# Altium PCB mchf_pro_ui.PcbDoc (part 2 of 6)
Units mm, origin at the board's own origin, x right, y up, seen from the top; angles counter-clockwise.
Board outline 200.09 x 143.79 mm, 2 copper layers (Top Layer, Bottom Layer); 329 components, 335 nets, 1276 pads, 515 vias.
Unrouted connection lines stored in the file: 91.
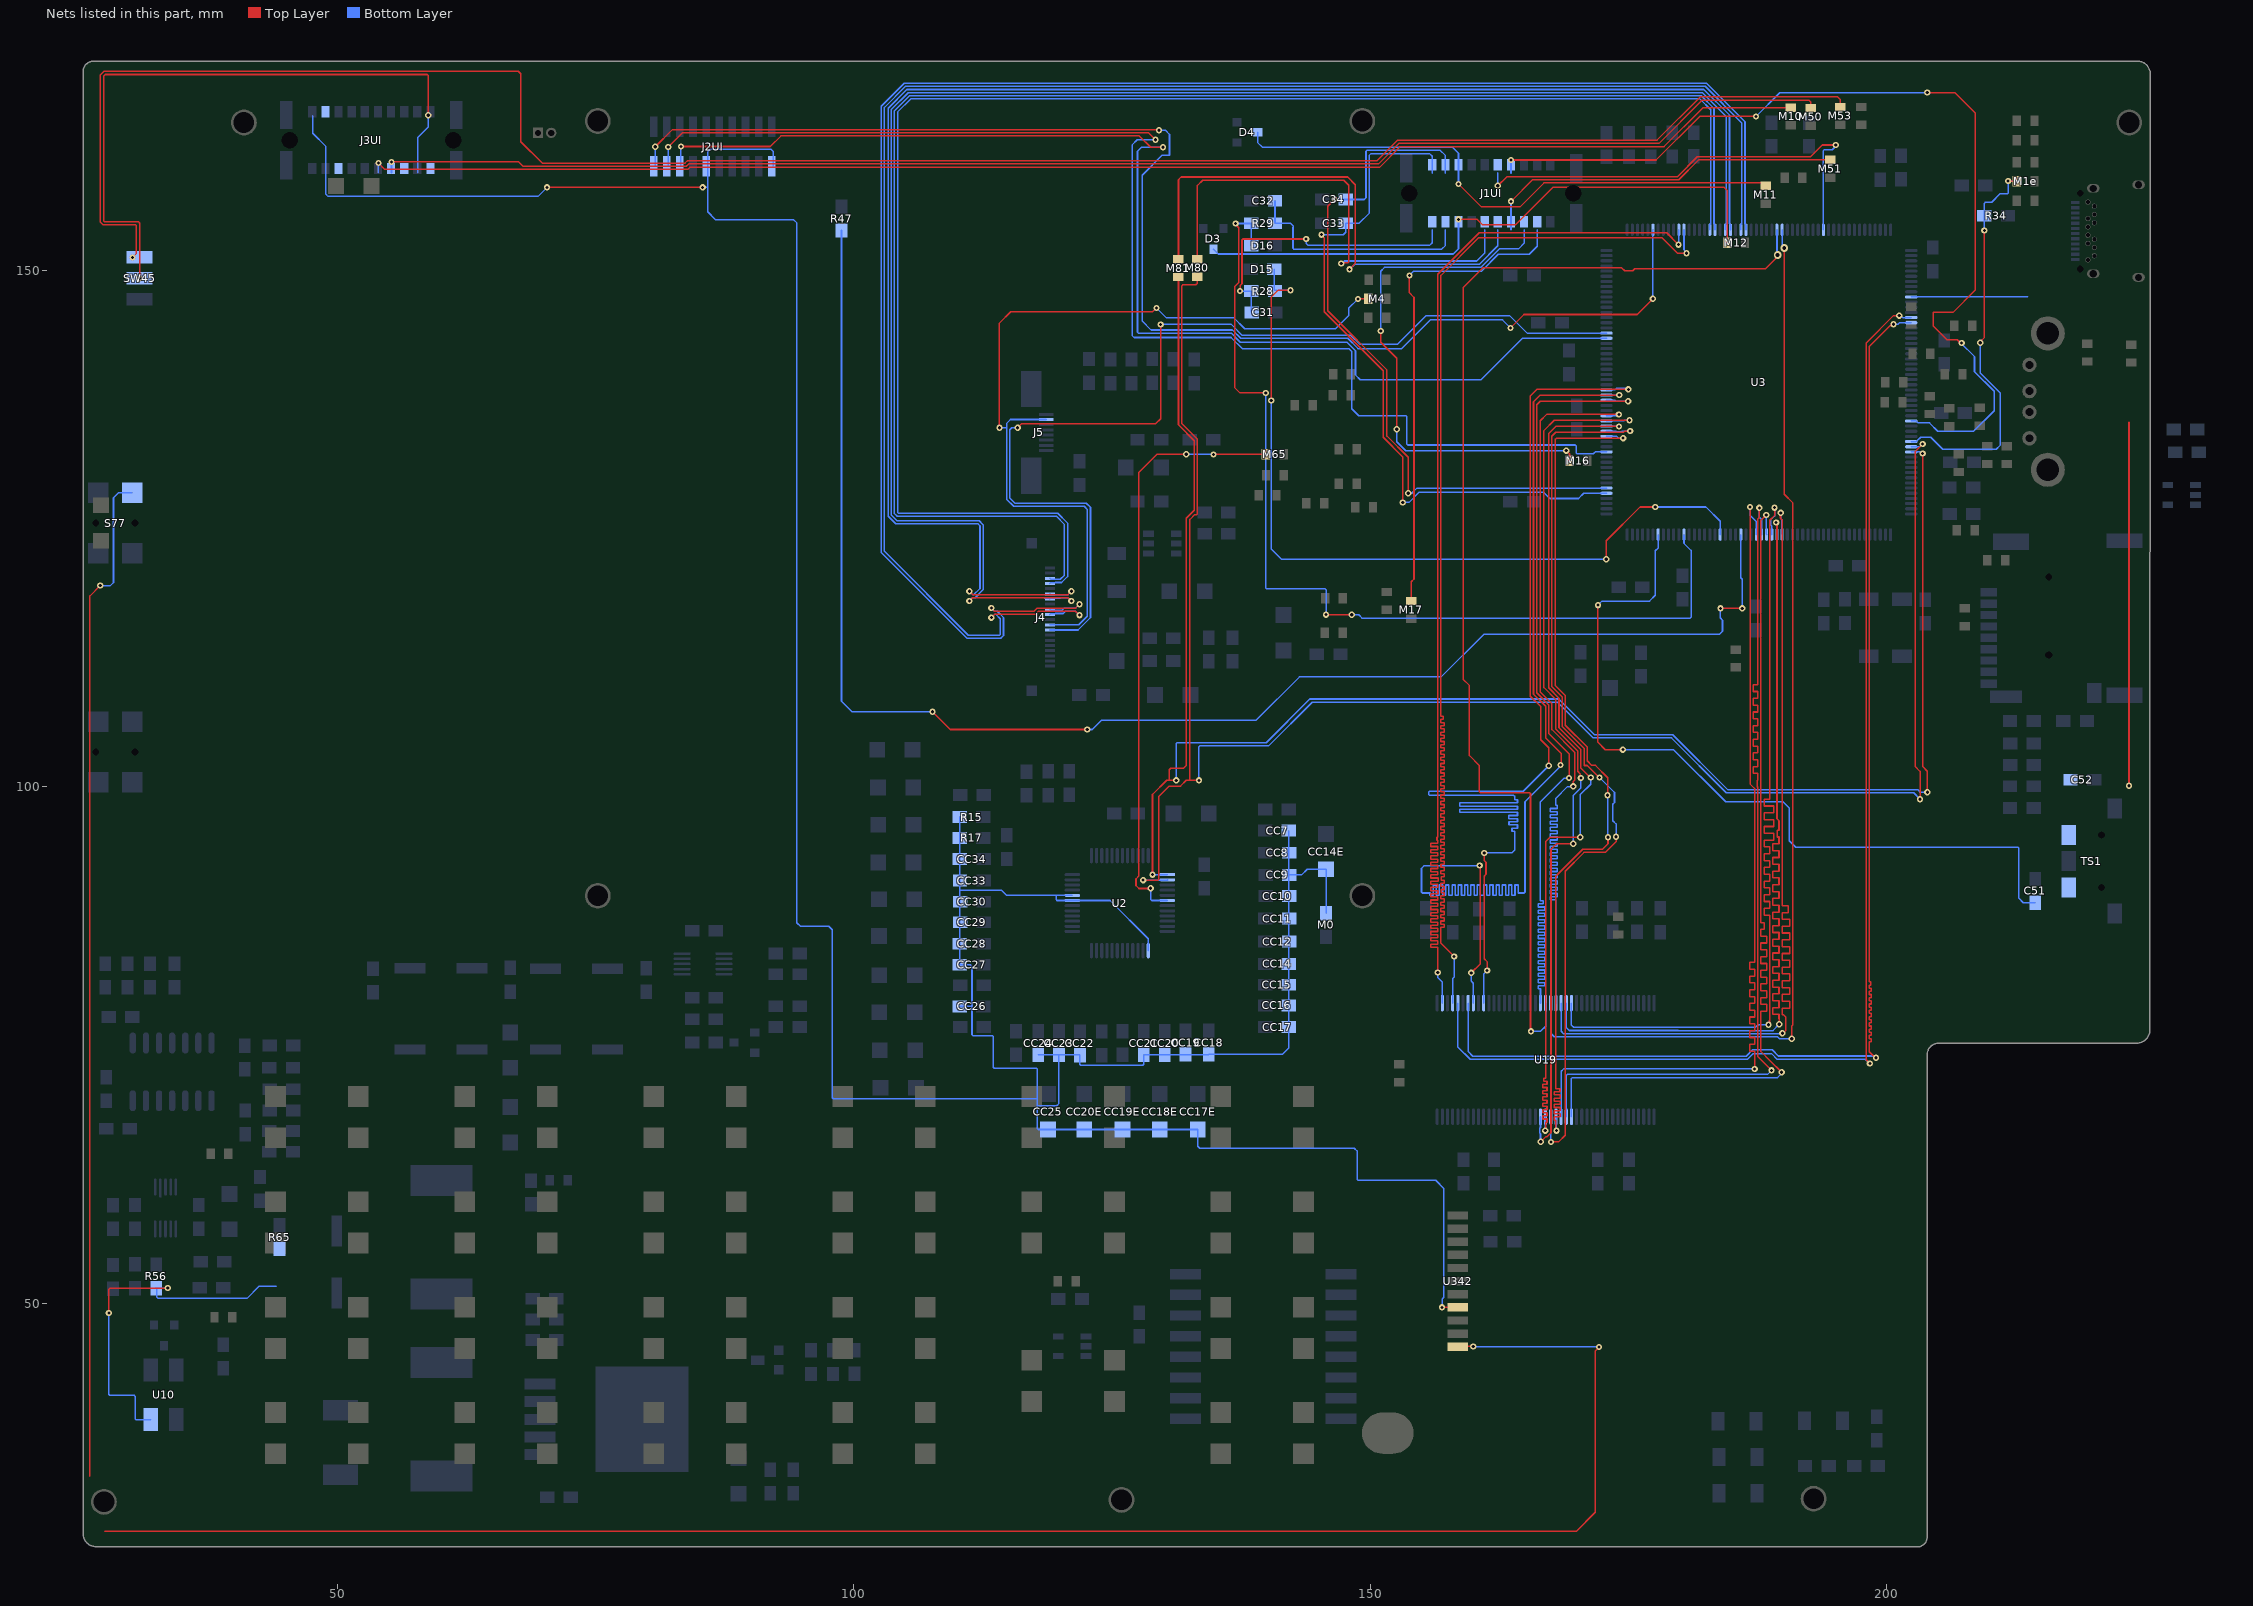
[diagram p2: the nets of this part, all layers, seen from the top]

## Part data
C1 C2 C5 C6 C7 C8 C9 C10 C11 C12 C13 C14 C15 C16 C17 C55 C66 CC14E CC17E CC18E CC19E CC20E CC25 CP44E: library part CAP-POL, "Electrolitic capacitor"
  C1: Notes="Aluminium capacitor", Order="FN 225-4321", Price=0.34, QT Order=QCC-00320
  C2 C6: Order="FN 225-4321", Price=0.34, QT Order=QCC-00320
  C5: Notes="Aluminium capacitor", Price=0.34
  C7 C66 CC17E CC18E: Order="FN 233-3009", Price=0.204, QT Order=QCC-00166
  C8: Notes="Tantalum capacitor", Order="FN 145-7406", Price=0.235, QT Order=QCC-00165
  C9 C10 C11 C12 C13 C14 C15 C16 C17: Order="FN 145-7406", Price=0.235, QT Order=QCC-00165
  C55: Order="FN 145-7414", Price=0.30, QT Order=QCC-00166
  CC14E: Notes="Tantalum capacitor", Order="FN 233-3009", Price=0.204, QT Order=QCC-00166
  CC19E CC25: Notes="Tantalum Capacitor", Price=0.204
  CC20E: Price=0.204
  CP44E: Order="FN 145-7406", Price=0.235, QT Order=QCC-00172
C3 C4 C18 C19 C31 C32 C32a C33 C34 C34d C39 C40 C43 C48 C51 C52 C53 C58 C59 C64 C65 C67 C68 C69 C70 C71 C72 C73 C751 CC5 CC7 CC8 CC9 CC10 CC11 CC12 CC14 CC15 CC16 CC17 CC18 CC19 CC20 CC21 CC22 CC23 CC24 CC26 CC26a CC27 CC27a CC28 CC29 CC30 CC33 CC34 CC36 CC46 Cp7 Cp17 Cp29 Cp44 Cp49 Cp56 Cp74 Cp80 Cp100 Cp108 Cp114 Cp117 CP119 CP119E Cp133 Cp155 Cp161 Cp179 Cp187 Cp208 Cr1 Cr3 Cr9 Cr15 Cr29 Cr35 Cr41 Cr43 Cr49 Cr55 Cr75 Cr81: library part CAP, "Capacitor"
  C3 C4 C31 C32 C33 C34 C34d C65 C67 C73 C751 CC5 CC14 CC17 CC18 CC19 CC20 CC30 CC36 CC46: Order="FN 252-2090", Price=0.068, QT Order=QCC-00154
  C18 C19 C59 C64 CC15 CP119 CP119E: Published=8-Jun-2000, Publisher="Altium Limited", Revision="July-2002: Re-released for DXP Platform."
  C32a: Price=0.068, QT Order=QCC-00154
  C39: Order="FN 756-8401", Price=0.341, QT Order=QCC-00266, QT Price=0.045
  C40: Order="FN 756-8401", Price=0.341, QT Order=QCC-00266
  C43 C48 C53 C58 Cp7 Cp17 Cp29 Cp44 Cp49 Cp56 Cp74 Cp80 Cp100 Cp108 Cp114 Cp117 Cp133 Cp155 Cp161 Cp179 Cp187 Cp208 Cr1 Cr3 Cr9 Cr15 Cr29 Cr35 Cr41 Cr43 Cr49 Cr55 Cr75 Cr81: Order="FN 282-1264", Price=0.089, QT Order=QCC-00157
  C51: Order="FN 190-7054", Price=0.038, QT Order=QCC-00259, QT Price=0.05
  C52: Order="FN 190-7054", Price=0.038, QT Order=QCC-00259
  C69 C70: Order="FN 233-2701", Price=0.078, QT Order=QCC-00125
  C72: Order="FN 174-0673", Price=0.068, QT Order=QCC-00154
  CC16: Notes="Ceramic Capacitor, low ESR", Published=8-Jun-2000, Publisher="Altium Limited", Revision="July-2002: Re-released for DXP Platform."
C42 C74g CP140: library part "CAP SMD 0603  X5R 1礔 25V 10%", "0603  X5R 1礔", Rated voltage=25V, Temperature Max=+125癈, Temperature Min=-55癈, Tolerance=10%, Order code Farnell=1288202RL, Technology=X5R
C56: library part CAP, "Ceramic Capacitor", Order="FN 175-9477", Price=0.114, QT Order=QCC-00447
C57: library part CAP-POL, "Electrolitic capacitor", Voltage=50V, Order="FN 145-7406", Price=0.235, QT Order=QCC-00172
C60 CP43E: library part "Cap Pol1", Published=8-Jun-2000, Publisher="Altium Limited", Revision="July-2002: Re-released for DXP Platform."
C61 C62 C63 C174 C176 C178 C222: library part CAP, "Capacitor", Voltage=100V
  C61 C62 C63: Notes=COG/NPO
  C174 C176 C178 C222: Price=0.068, QT Order=QCC-00154
C175: library part CAP-POL, "Electrolitic capacitor", Voltage=25V, Price=0.235, QT Order=QCC-00202
C177: library part CAP-POL, "Electrolitic capacitor", Voltage=16V, Price=0.235, QT Order=QCC-00202
CP43 CP199: library part Cap, "Capacitor", Published=8-Jun-2000, Publisher="Altium Limited", Revision="July-2002: Re-released for DXP Platform."
CP89 CP152: library part cap, "Capacitor", ECCN_US/EU=NA, Fitted=NO, Notes="Ceramic capacitor, low ESR", Ordered by=Subcon, Published=8-Jun-2000, Publisher="Altium Limited", Revision="July-2002: Re-released for DXP Platform."
D3 D4: "Small Signal Diode, Dual Series", Order="FN 162-1837", Price=0.0618
  D3: QT Order=QCD-00039
D15 D16: library part "D Zener", "Zener Diode", LatestRevisionDate=17-Jul-2002, LatestRevisionNote="Re-released for DXP Platform.", PackageDescription="Diode, Thru-Hole; 2 Leads; 0.7 in Pin Spacing", PackageReference=DIODE-0.7, Published=8-Jun-2000, Publisher="Altium Limited"
D17 D18 D19 D120 D123: "DIODE, SCHOTTKY, 1A, 60V, SOD-123F", QT Order=QCD-00034
  D17 D18 D120 D123: Price=0.085
  D19: Order="FN 151-0694", Price=0.262, QT Price=0.08
D108: library part PMEG6010CEH, "DIODE, SCHOTTKY, 1A, 60V, SOD-123F", Price=0.085, QT Order=QCD-00034
J1UI J3UI: "SMD male connector, nominal current: 2.2 A, Test voltage: 840 VAC, number of positions: 20, pitch: 1.27 mm, color: black, contact surface: Gold, type of contact: Male connector, mounting: SMD soldering", Manufacturer_Name="Phoenix Contact", Mouser Part Number=651-1373866, Datasheet Link=http://www.phoenixcontact.com/gb/produkte/1373866, Geometry.Height=6.75mm, Manufacturer_Part_Number=1373866, Mouser Price/Stock=https://www.mouser.co.uk/ProductDetail/Phoenix-Contact/1373866?qs=2SLPxufLcgAs0enIXKjUUw%3D%3D
J2UI: library part YQ_20p, "SMD male connector, nominal current: 2.2 A, Test voltage: 840 VAC, number of positions: 20, pitch: 1.27 mm, color: black, contact surface: Gold, type of contact: Male connector, mounting: SMD soldering", Manufacturer_Name="Phoenix Contact", Mouser Part Number=651-1373866, Datasheet Link=http://www.phoenixcontact.com/gb/produkte/1373866, Geometry.Height=6.75mm, Manufacturer_Part_Number=1373866, Mouser Price/Stock=https://www.mouser.co.uk/ProductDetail/Phoenix-Contact/1373866?qs=2SLPxufLcgAs0enIXKjUUw%3D%3D
J4: library part KD050FWFID042-C010B, "LCD-20pin FPC, Top contacts position", Notes="FPC Board Connector, 0.5 mm, 20 Contacts, Receptacle, Top contacts position!", Order="FN 3215802"
J5: library part FPC8, "8 pin FPC, Top contacts position", Notes="FPC Board Connector, 0.5 mm, 8 Contacts, Receptacle,Top contact position", Order="FN 2614916"
J20: library part usbc_24p, "Universal Serial Bus (USB) Shielded I/O Receptacle, Type C, Vertical, Surface Mount, Height 8.8mm, 16 Circuits, Gold (Au) Flash Plating", Manufacturer_Name=Molex, Mouser Part Number=538-219320-0001, Datasheet Link=https://www.molex.com/content/dam/molex/molex-dot-com/products/automated/en-us/salesdrawingpdf/219/219320/2193200001_sd.pdf?inline, Geometry.Height=9.05mm, Manufacturer_Part_Number=219320-0001, Mouser Price/Stock=https://www.mouser.co.uk/ProductDetail/Molex/219320-0001?qs=rQFj71Wb1eXha8qVBIXu3A%3D%3D
J21: "USB Host Connector"
J100: library part microSD-PJS008-2003, "Memory Card Connectors MicroSD Card Conn Revrs Mnt Push-Push", Manuf_1=YAMAICHI, Manuf_Part_1=PJS008-2003-1, ECCN_US/EU=n/a, Notes="need to find on Ali!", Order=PJS008-2003-1
L128 RFC102: library part TDK-NLV25T, "POWER INDUCTOR, 47UH, 1210", Notes="Power inductor", Price=0.166
LD1 LD2: library part LED2, "LED 3mm", Price=0.116, QT Order=QCD-00052, Revision="July-2002: Re-released for DXP Platform."
"LORA ANT": "Test point"
M0 M1 M35 M36 M37 M38 M39 M40 M41 R1 R2 R3 R4 R5 R6 R7 R8 R9 R10 R11 R12 R13 R14 R15 R16 R17 R28 R29 R31 R32 R32a R32b R33 R34 R36 R37 R38 R39 R40 R41 R47 R48 R49 R50 R51 R52 R53 R54 R55 R56 R57 R58 R59 R60 R61 R62 R63 R64 R65 R134 R135 R222 R333 R389 R444: library part RES, "Resistor"
  M0 M1 M35 M36 M37 M38 M39 M40 M41: Order="FN 933-3681", Price=0.009, QT Order=QCR-00268
  R1 R2 R5 R6 R11: Order="FN 188-7289", Price=0.046, QT Order=QCR-00333
  R3 R4: Order="FN 157-6459", Price=0.061, QT Order=QCR-00579
  R7 R8 R12 R13: Order="FN 933-2421", Price=0.013, QT Order=QCR-00279
  R9 R10: Order="FN 207-8984", Price=0.02, QT Order=QCR-00412
  R14 R15 R16 R17: Price=0.013
  R28 R29 R47 R389: Order="FN 146-9899", Price=0.023, QT Order=QCR-00309
  R31 R56 R57 R58 R65: Order="FN 933-2375", Price=0.027, QT Order=QCR-00301
  R32 R33 R34 R37 R38 R39 R40 R41: Order="FN 146-9857", Price=0.046
  R32a R32b: Notes="Tolerance better than 1%", Price=0.009
  R36: Order="FN 146-9857", Price=0.046, QT Order=QCR-00349, QT Price=0.03
  R48: Order="FN 157-6459", Price=0.061, QT Order=QCR-00326
  R49 R50: Order="FN 200-8383", Price=0.03, QT Order=QCR-00341
  R51: Order="FN 188-7289", Price=0.075, QT Order=QCR-00333, QT Price=0.03
  R52: Notes="What is the biggest power rating to fit into 1206 ?", Order="FN 207-3875", Price=0.024, QT Order=QCR-00419, QT Price=0.03
  R53 R54 R55 R59 R60 R62 R64: Order="FN 200-8383", Price=0.024, QT Order=QCR-00341
  R61 R63: Price=0.024
  R134: Order=652-CR0805JW-162ELF, Price=0.024, QT Order=QCR-00341
  R135 R444: Price=0.024, QT Order=QCR-00341
M1a M1b M1c M1d M1e M2 M3 M4 M5 M6 M7 M8 M9 M10 M11 M12 M13 M14 M15 M16 M17 M18 M22 M25 M34 M34a M42 M43 M50 M51 M52 M53 M60 M61 M62 M63 M64 M65 M66 M67 M68 M69 M70 M71 M72 M73 M74 M75 M76 M77 M78 M80 M81 M85 M101s M120 M121: library part Link, "Link", Published=8-Jun-2000, Publisher="Altium Limited", Revision="July-2002: Re-released for DXP Platform."
P324: "Header, 2-Pin", LatestRevisionDate=17-Jul-2002, LatestRevisionNote="Re-released for DXP Platform.", Publisher="Altium Limited"
Q1 Q2222: library part MOSFET-N, "N-Channel MOSFET", Price=0.231, QT Order=QCT-00022, QT Price=0.28
  Q1: Order="FN 186-4517"
RFC1 RFC3 RFC6: library part Inductor, "Inductor"
  RFC1 RFC6: Order="FN 166-9895", Price=0.16
  RFC3: Published=8-Jun-2000, Publisher="Altium Limited", Revision="July-2002: Re-released for DXP Platform."
RFC4 RFC5: library part Inductor, "Power Inductor", Price=0, QT Order=QCL-00097, QT Price=0.085
  RFC4: Notes="Don't we already have selection for 0.8.0(bigger than 0805) ?"
S0 S1 S2 S3 S4 S5 S6 S7 S8 S9 S10 S11 S12 S13 S14 S15 S16 S17 S18 S19 S20 S21 S22: library part SW-PB, "Push Button"
S44 S77: library part SW-PBS, "Push Side Button"
SW45: library part SW3, "Three pole switch", Order="FN 118-1070", Price=2.19
TS1: "Thumbwheel Toggle Switch", Order="FN 206-4978"
U1: library part LM4853, "Mono 1.5 W / Stereo 300mW Power Amplifier", Notes="300mW 1ch Mono, 2ch Stereo Audio Amp"
U2: "Audio CODEC"
U3: "STM32H747BIT6 LQFP208", Order="FN 248-4976", Price=10.97
U4 U14a: library part AP22811, "High-side switch", Order="FN 274-8550"
U8: "Charge Pump", Notes="Originally from Thomas, if not Ali", Order=Hotmcu.com, Price=0.5, QT Order=QCI-01775, QT Price=0.27
U10: library part FOX924B-16.000, "TCXO", Order="FN 206-3959", Price=2.77
U11: "3.3V voltage reference, SOT-23"
U12: "I2C-Programmable Any-Frequency CMOS Clock Generator + VCXO, 2.5 / 3.3 V, 0.008 to 160 MHz Output, -40 to 85 degC, 10-pin SOP", MANUFACTURER="Silicon Labs", Output Frequency (MHz)="0.008 to 160", Supplier Part Number 1=336-1994-5-ND, Code_IPC=J-STD-020, Code_JEDEC=MO-187, ComponentLink1Description="Manufacturer URL", ComponentLink1URL=http://www.silabs.com/, ComponentLink2Description=Datasheet, ComponentLink2URL=http://www.silabs.com/Support%20Documents/TechnicalDocs/Si5351.pdf, ComponentLink3Description="Package Specification", ComponentLink3URL="http://www.silabs.com/Support Documents/TechnicalDocs/C8051T60x.pdf", DatasheetVersion="Rev. 0.95", Mounting Technology="Surface Mount", Notes="Farnell had it cheap (like 80 pence)", Output Format=LVCMOS, PackageDescription="10-Pin Mini Small Outline Package, Body 3 x 3 mm, Pitch 0.5 mm", PackageReference=MSOP-10, PartNumber=Si5351A-A-GT, Reference Inputs=1, Sub-Family="Clock Generators", Supplier 1=Digi-Key, Supplier 2=Mouser, Supplier Part Number 2=634-SI5351A-A-GT, VDD="2.5 V; 3.3 V"
U13: library part 74LCX74M, "Low Voltage Dual D-Type Positive Edge-Triggered  Flip-Flop with 5V Tolerant Inputs", Notes="Can use PO74G74A, but remove M52, install M53", Order="FN 985-3502", Price=0.23, QT Order=QCI-00713
U15: "RFM96 - 433Mhz Lora transceiver", Notes="Ali has them cheap, 2-3 USD each"
U19: "128Mb PC133 SDR SDRAM, 4Mb x 32, 6ns, 3.3V, 0 to 70 degC, 86-Pin TSOP", Order="FN 225-3746", Price=8.55
U106: "V REG ADJ +5/20V, SMPS TO-263-5", Notes="In bulk from Ali", Price=1.28
U342: "KCX_BT_EMITTER V 1.7"
Y1: library part SmdCrystal, "32kHz Crystal", Order="FN 283-2029", Price=0.34

## Free pads (board coordinates)
  round 2.5 hole 2: 1(27.4,30.775) 1(40.95,164.3) 1(75.206,89.45) 1(75.206,164.45) 1(125.9,30.975) 1(149.21,89.45) 1(149.21,164.45) 1(192.898,31.085) 1(223.45,164.3)

## Via types
v1: diameter 0.61, hole 0.305, Top Layer to Bottom Layer, 511 vias
v2: diameter 0.762, hole 0.381, Top Layer to Bottom Layer, 4 vias

## Nets (pads, with @x,y where several pads share a name; then routed paths per layer and width w, separated by ;. In a path a pad name is that pad's centre, name@x,y a point inside that pad or via, vN(x,y) a via of type N, cw(c..) or ccw(c..) an arc to the next point about the centre after c; other vN are vias at no path point)
ADC3_INP1: D16.2 R29.2 U3.41 | length 94.1
  Top Layer w0.152: v1(136.95,154.525) 136.95,154.421 137.259,154.112 137.259,148.819 136.846,148.407 136.846,138.658 137.38,138.125 v1(139.867,138.125) ; v1(145.705,116.66) 145.711,116.653 148.179,116.653 v1(148.185,116.647)
  Bottom Layer w0.152: v1(136.95,154.525) 138.45,154.525 R29.2@138.475,154.55 138.475,152.4 D16.2@138.45,152.375 ; v1(139.867,138.125) 139.867,119.239 139.956,119.15 145.615,119.15 145.705,119.061 v1(145.705,116.66) ; v1(148.185,116.647) 148.865,116.647 149.184,116.328 180.948,116.328 181.037,116.418 181.037,122.869 180.349,123.557 U3.41@180.349,124.414
ADC3_INP1x: C32.2 J1UI.A19 R29.1 | length 22.7
  Bottom Layer w0.152: C32.2@140.761,156.725 R29.1@140.761,154.55 142.266,154.55 142.512,154.304 142.512,154.178 142.5,154.166 142.5,152.109 142.575,152.034 156.886,152.034 157.252,152.4 157.252,153.916
ADC3_INP6: D15.2 R28.2 U3.34 | length 79
  Top Layer w0.152: v1(140.4,137.4) 140.4,147.414 141.049,148.063 v1(142.266,148.063) ; v1(172.823,122.025) 172.823,123.803 176.099,127.079 v1(177.571,127.079)
  Bottom Layer w0.152: v1(140.4,137.4) 140.4,123.019 141.394,122.025 v1(172.823,122.025) ; D15.2@140.683,150.087 140.683,148.063 v1(142.266,148.063) ; v1(177.571,127.079) 182.476,127.079 183.849,125.706 U3.34@183.849,124.414
ADC3_INP6x: C31.2 J1UI.A20 R28.1 | length 28.5
  Top Layer w0.152: v1(137.38,147.985) 137.389,147.994 137.389,148.518 137.563,148.693 137.563,152.936 137.653,153.025 v1(143.775,153.025)
  Bottom Layer w0.152: v1(137.38,147.985) R28.1@138.475,147.985 138.475,145.936 C31.2@138.497,145.914 ; v1(143.775,153.025) 143.794,153.006 143.794,152.595 143.989,152.4 155.725,152.4 155.982,152.657 155.982,153.916
ADC3_INP8: R47.1 U3.30 | length 147.6
  Top Layer w0.152: v1(107.6,107.267) 109.323,105.544 v1(122.579,105.544) ; v1(183.883,117.274) v1(185.991,117.274)
  Bottom Layer w0.152: R47.1@98.8,153.847 98.8,108.275 99.808,107.267 v1(107.6,107.267) ; v1(122.579,105.544) 123.069,105.544 123.984,106.458 138.947,106.458 143.122,110.633 156.839,110.633 160.958,114.752 183.768,114.752 184.076,115.06 184.076,116.124 183.849,116.351 183.849,117.24 v1(183.883,117.274) ; U3.30@185.849,124.414 185.849,120.241 185.991,120.099 v1(185.991,117.274)
AGND: CC7.1 CC8.1 CC9.2 CC10.2 CC11.1 CC12.1 CC14.1 CC14E.2 CC15.1 CC16.1 CC17.1 CC17E.2 CC18.2 CC18E.2 CC19.1 CC19E.2 CC20.2 CC20E.2 CC21.2 CC22.2 CC23.1 CC24.1 CC25.2 CC26.2 CC27.2 CC28.1 CC29.1 CC30.1 CC33.2 CC34.2 J2UI.A11 J2UI.A16 J3UI.A3 J3UI.A12 M0.2 R15.2 R17.2 U2.13 U2.31 U2.32 U342.8 | length 357.5
  Top Layer w0.152: v1(70.291,158.02) v1(85.355,158.02) ; v1(156.929,49.608) 158.448,49.608 U342.8@158.45,49.61
  Bottom Layer w0.152: 47.62,164.95 47.62,163.255 48.89,161.985 48.89,157.36 49.1,157.15 69.421,157.15 v1(70.291,158.02) ; v1(85.355,158.02) 85.84,158.02 ; J2UI.A11@92.19,160.07 92.19,161.499 91.975,161.714 86.085,161.714 85.84,161.47 85.84,158.02 ; R15.2@110.24,97.071 R17.2@110.24,95.048 110.24,89.993 ; CC26.2@110.245,78.74 110.267,78.763 111.431,78.763 ; CC28.1@110.264,84.811 CC28.1@110.24,84.811 ; CC24.1@117.849,74.046 CC23.1@119.845,74.046 ; U2.32@121.142,89.493 119.567,89.493 ; U2.13@128.492,84.143 128.492,85.288 124.787,88.993 U2.31@121.142,88.993 119.656,88.993 119.567,89.082 119.567,89.493 ; CC7.1@142.11,95.758 CC9.2@142.11,91.468 ; M0.2@145.705,87.776 CC14E.2@145.705,92.009 143.869,92.009 143.329,91.468 CC9.2@142.139,91.468 CC9.2@142.11,91.468 ; v1(156.929,49.608) 156.929,50.404 157.1,50.575 157.1,61.114 156.313,61.901 148.795,61.901 148.706,61.99 148.706,64.741 148.438,65.009 133.482,65.009 133.292,65.199 CC17E.2@133.292,66.825 CC18E.2@129.607,66.825 CC19E.2@125.992,66.825 CC20E.2@122.304,66.825 CC25.2@118.784,66.825 117.855,66.825 117.765,66.914 117.765,69.132 ; 85.84,158.02 85.84,155.66 86.611,154.889 94.155,154.889 94.482,154.563 94.482,87.65 94.475,87.643 94.475,86.85 94.832,86.493 97.557,86.493 97.902,86.148 97.902,69.889 97.991,69.8 117.765,69.8 ; CC28.1@110.24,84.811 110.24,89.993 ; CC28.1@110.24,84.811 CC27.2@110.24,82.78 111.258,82.78 111.431,82.607 111.431,78.763 ; 110.24,89.993 114.278,89.993 114.778,89.493 119.567,89.493 ; 111.431,78.763 111.431,76.015 111.537,75.909 113.397,75.909 113.487,75.82 113.487,72.841 113.576,72.751 117.675,72.751 117.765,72.661 117.765,69.8 ; 117.765,69.132 117.765,69.8 ; 117.765,69.132 119.638,69.132 119.845,69.339 CC23.1@119.845,74.046 ; CC23.1@119.845,74.046 121.847,74.046 CC22.2@121.868,74.025 121.868,73.139 121.958,73.049 127.969,73.049 128.058,73.139 CC21.2@128.058,74.048 CC20.2@130.087,74.048 134.306,74.048 CC18.2@134.354,74.095 141.47,74.095 142.091,74.717 142.091,76.736 CC17.1@142.098,76.744 142.11,76.755 CC9.2@142.11,91.468
ATT_CLK: J2UI.A19 U3.65 | length 126.8
  Top Layer w0.152: v1(82.026,161.928) 83.406,163.308 128.517,163.308 v1(129.2,162.625)
  Bottom Layer w0.152: v1(82.026,161.928) 82.026,160.074 J2UI.A19@82.03,160.07 ; v1(129.2,162.625) 127.422,162.625 126.922,162.125 126.922,143.683 127.117,143.488 136.509,143.488 137.582,142.414 147.904,142.414 148.185,142.133 148.185,136.596 148.86,135.921 153.436,135.921 153.525,135.831 153.525,133.172 153.614,133.083 169.833,133.083 169.922,132.993 169.922,132.316 170.012,132.227 171.565,132.227 171.752,132.414 U3.65@172.849,132.414
ATT_DATA: J2UI.A20 U3.110 | length 132
  Top Layer w0.152: v1(80.77,161.947) 82.435,163.613 129.462,163.613 v1(129.525,163.55) ; v1(163.559,144.414) 164.863,145.719 175.83,145.719 177.333,147.222 v1(177.333,147.238)
  Bottom Layer w0.152: J2UI.A20@80.76,160.07 80.77,160.08 v1(80.77,161.947) ; v1(129.525,163.55) 130.15,163.55 130.55,163.15 130.55,161.15 129.85,161.15 127.9,159.2 127.9,145.082 128.762,144.219 136.639,144.219 137.444,143.414 147.796,143.414 148.796,142.414 153.019,142.414 155.796,145.192 162.782,145.192 v1(163.559,144.414) ; v1(177.333,147.238) 177.332,153.898 U3.110@177.349,153.914
ATT_LE: J2UI.A18 U3.87 | length 119.9
  Top Layer w0.152: v1(83.253,161.976) 91.901,161.976 92.929,163.004 127.621,163.004 128.725,161.9 v1(129.925,161.9)
  Bottom Layer w0.152: v1(83.253,161.976) 83.253,160.117 J2UI.A18@83.3,160.07 ; v1(129.925,161.9) 127.839,161.9 127.45,161.511 127.45,144.004 127.539,143.914 136.513,143.914 137.403,143.025 147.725,143.025 148.554,142.196 148.554,139.871 149.013,139.412 160.703,139.412 164.705,143.414 U3.87@172.849,143.414
BAND0: J3UI.A8 M50.1 | length 141.9
  Top Layer w0.152: v1(55.24,160.485) 67.548,160.485 67.968,160.065 83.778,160.065 84.006,160.293 150.768,160.293 152.75,162.275 177.925,162.275 182.12,166.47 192.43,166.47 192.6,166.3 M50.1@192.6,165.707
  Bottom Layer w0.152: 55.24,159.45 v1(55.24,160.485)
BAND1: J3UI.A7 M10.1 | length 140.4
  Top Layer w0.152: v1(53.97,160.375) 54.585,159.76 83.904,159.76 84.095,159.951 150.875,159.951 152.894,161.97 178.42,161.97 182.191,165.741 M10.1@190.698,165.741
  Bottom Layer w0.152: 53.97,159.45 v1(53.97,160.375)
BAND2: J1UI.A13 M16.1 | length 51.3
  Top Layer w0.152: v1(151,144.11) 151,143.031 152.551,141.48 v1(152.551,134.607) ; v1(168.954,132.538) 169.268,132.224 M16.1@169.268,131.563
  Bottom Layer w0.152: v1@150.997,144.11 150.997,149.914 151.353,150.27 160.672,150.27 162.465,152.064 164.322,152.064 164.872,152.614 164.872,153.916 ; v1(152.551,134.607) 152.551,133.406 153.419,132.538 v1(168.954,132.538)
BAND3: J1UI.A12 M17.1 | length 47
  Top Layer w0.152: v1(153.772,149.487) 153.772,147.813 154.213,147.372 154.213,120.102 153.959,119.848 M17.1@153.959,117.98
  Bottom Layer w0.152: v1(153.772,149.487) 153.772,149.513 154.174,149.914 160.747,149.914 162.376,151.543 165.373,151.543 166.142,152.312 166.142,153.916
BMS_IRQ: J1UI.A14 M51.1 | length 35.3
  Top Layer w0.152: v1(163.607,156.666) 165.696,158.755 179.836,158.755 181.761,160.68 M51.1@194.523,160.68
  Bottom Layer w0.152: 163.602,153.916 163.607,153.921 v1(163.607,156.666)
BMS_SCL: J1UI.A16 M80.2 | length 47
  Top Layer w0.152: M80.2@133.25,151.082 133.25,158.212 133.758,158.72 147.409,158.72 147.904,158.225 147.904,150.797 147.815,150.708 147.225,150.708 v1(147.165,150.648)
  Bottom Layer w0.152: v1(147.165,150.648) 147.234,150.648 147.483,150.896 160.292,150.896 160.51,151.114 161.062,151.667 161.062,153.916
BMS_SDA: J1UI.A15 M81.2 | length 50.5
  Top Layer w0.152: M81.2@131.417,151.057 131.417,158.771 131.671,159.025 147.79,159.025 148.535,158.279 148.535,150.653 v1(147.97,150.087)
  Bottom Layer w0.152: v1(147.97,150.087) 148.474,150.592 160.562,150.592 162.332,152.362 162.332,153.916
BOOT0: M1e.1 R34.2 U3.194 | length 38.5
  Top Layer w0.152: v1(209.031,142.987) 209.031,143.087 209.428,143.484 v1(209.428,153.842) ; v1(211.725,158.63) M1e.1@212.563,158.63
  Bottom Layer w0.152: U3.194@202.349,133.414 202.835,133.414 203.257,133.837 204.232,133.837 205.394,132.675 210.585,132.675 210.95,133.04 210.95,138.134 209.031,140.053 v1(209.031,142.987) ; v1(209.428,153.842) R34.2@209.428,155.275 209.428,156.487 209.517,156.576 210.131,156.576 210.95,157.395 211.636,157.395 211.725,157.485 v1(211.725,158.63)
BT_PAIR: S77.2 U342.11 | length 273.2
  Top Layer w0.152: 26.041,33.25 26.041,118.466 v1(27.05,119.475) ; 27.488,27.918 169.911,27.918 171.769,29.776 171.769,45.376 172.125,45.732 v1(172.125,45.775) ; U342.11@158.45,45.8 158.475,45.825 v1(159.956,45.825)
  Bottom Layer w0.152: v1(27.05,119.475) 28.025,119.475 28.325,119.775 28.325,127.975 28.796,128.446 S77.2@30.156,128.446 ; v1(159.956,45.825) 160.006,45.775 v1(172.125,45.775)
CLK_25Mhz: R56.2 R65.2 U10.3 | length 36.4
  Top Layer w0.152: v1(27.875,49.057) 27.863,49.069 27.863,51.338 28,51.475 v1(33.575,51.475)
  Bottom Layer w0.152: v1(27.875,49.057) 27.875,41.19 27.964,41.101 30.323,41.101 30.412,41.012 30.412,38.834 30.501,38.744 U10.3@31.919,38.744 ; v1(33.575,51.475) 32.477,51.475 R56.2@32.456,51.454 32.5,51.41 32.5,50.625 32.653,50.472 41.247,50.472 42.445,51.67 44.091,51.67
CODEC_RESET: M65.1 U2.6 | length 57.4
  Top Layer w0.152: v1(128.721,90.182) 128.693,90.155 127.596,90.155 127.304,90.447 127.304,91.082 127.575,91.353 127.575,130.423 129.335,132.183 v1(132.173,132.183) ; v1(134.8,132.173) M65.1@139.875,132.173
  Bottom Layer w0.152: v1(128.721,90.182) 128.721,89.082 128.81,88.993 U2.6@130.342,88.993 ; v1(132.173,132.183) 132.178,132.178 134.795,132.178 v1(134.8,132.173)
CODEC_SCL: M80.1 U2.2 U3.195 | length 182.5
  Top Layer w0.152: v1(127.992,90.962) 129.423,90.962 129.512,91.051 129.512,99.07 130.512,100.07 131.62,100.07 132.173,100.623 132.525,100.623 ; M80.1@133.25,149.368 133.25,148.737 133.098,148.584 131.84,148.584 131.751,148.495 131.751,135.13 133.25,133.63 133.25,126.414 133.161,126.325 132.975,126.325 132.525,125.875 132.525,100.623 ; v1(133.398,100.623) 132.525,100.623 ; v1(203.2,98.798) 203.2,101.484 202.725,101.959 202.725,132.46 v1(203.45,133.185)
  Bottom Layer w0.152: v1(127.992,90.962) 129.606,90.962 129.609,90.965 130.314,90.965 U2.2@130.342,90.993 U2.2@130.37,90.965 ; v1(133.398,100.623) 133.398,103.868 133.488,103.957 140.126,103.957 144.363,108.195 168.099,108.195 171.567,104.727 179.138,104.727 184.445,99.42 202.578,99.42 v1(203.2,98.798) ; U3.195@202.349,132.914 203.15,132.914 203.421,133.185 v1(203.45,133.185)
CODEC_SDA: M81.1 U2.1 U3.196 | length 179
  Top Layer w0.152: v1(128.904,91.495) 128.904,99.258 130.269,100.623 130.512,100.623 ; v1(131.206,100.623) 130.512,100.623 ; M81.1@131.417,149.292 131.417,135.033 132.945,133.504 132.945,126.766 132.173,125.994 132.173,102.061 131.912,101.8 130.675,101.8 130.525,101.65 130.525,100.636 130.512,100.623 ; v1(203.45,132.262) 203.45,101.957 203.905,101.503 v1(203.905,99.474)
  Bottom Layer w0.152: v1(128.904,91.495) 128.905,91.494 130.341,91.494 U2.1@130.342,91.493 ; v1(131.206,100.623) 131.206,104.182 131.296,104.271 139.904,104.271 144.132,108.499 168.226,108.499 171.693,105.032 179.264,105.032 184.571,99.725 202.975,99.725 203.226,99.474 v1(203.905,99.474) ; U3.196@202.349,132.414 203.174,132.414 203.327,132.262 v1(203.45,132.262)
DAC1_OUT1: C33.1 J1UI.A10 U3.57 | length 69.3
  Top Layer w0.152: v1(145.259,153.447) 145.259,153.393 145.523,153.129 145.523,145.976 151.225,140.274 151.225,133.824 153.124,131.925 v1(153.124,127.522)
  Bottom Layer w0.152: v1(145.259,153.447) 147.372,153.447 147.6,153.675 C33.1@147.6,154.55 148.9,154.55 149.9,155.55 149.9,161.15 150.045,161.295 155.725,161.295 155.982,161.038 155.982,159.416 ; v1(153.124,127.522) 153.725,127.522 154.726,128.523 166.737,128.523 167.357,127.903 170.138,127.903 170.65,128.414 U3.57@172.849,128.414
DAC1_OUT2: C34.1 J1UI.A9 U3.58 | length 68.6
  Top Layer w0.152: v1(146.525,156.85) 145.861,156.186 145.861,146.069 151.589,140.341 151.589,133.956 153.658,131.888 v1(153.658,128.414)
  Bottom Layer w0.152: v1(146.525,156.85) C34.1@147.6,156.85 149.4,156.85 149.571,157.021 149.571,161.511 149.661,161.6 156.761,161.6 157.252,161.109 157.252,159.416 ; v1(153.658,128.414) 154.001,128.414 154.501,128.914 U3.58@172.849,128.914
DAH_IRQ: D4.3 J1UI.A8 M11.1 | length 55.6
  Top Layer w0.152: v1(158.522,158.358) 160.748,156.132 164.472,156.132 166.79,158.45 187.964,158.45 M11.1@188.25,158.164
  Bottom Layer w0.152: D4.3@139.075,163.35 139.075,162.375 139.55,161.9 149.4,161.9 149.405,161.905 157.945,161.905 158.522,161.328 158.522,159.416 v1(158.522,158.358)
DIT_IRQ: D3.3 J1UI.A18 M12.1 | length 59.9
  Top Layer w0.152: v1(158.525,154.925) 160.308,154.925 160.841,154.392 164.033,154.392 167.691,158.05 184.2,158.05 184.541,157.709 M12.1@184.541,152.663
  Bottom Layer w0.152: D3.3@134.8,152.034 135.259,151.575 158.01,151.575 158.522,152.087 158.522,153.916 158.525,153.918 v1(158.525,154.925)
DSI_CLK_N: J4.15 U3.125 | length 163.6
  Top Layer w0.152: v1(111.175,118.925) 111.496,118.604 120.729,118.604 v1(121.05,118.925)
  Bottom Layer w0.152: v1(111.175,118.925) 111.175,118.91 111.482,118.604 111.608,118.604 112.2,119.196 112.2,125.249 111.999,125.45 104.051,125.45 103.311,126.19 103.311,165.686 105.12,167.495 182.274,167.495 184.752,165.017 184.752,154.502 184.849,154.404 U3.125@184.849,153.914 ; 118.462,118.577 118.486,118.601 118.901,118.601 J4.15@118.975,118.675 119.049,118.601 119.464,118.601 119.488,118.577 119.847,118.577 119.873,118.604 120.729,118.604 v1(121.05,118.925)
DSI_CLK_P: J4.14 U3.124 | length 163.1
  Top Layer w0.152: v1(111.175,117.977) 111.496,118.299 120.729,118.299 v1(121.05,117.977)
  Bottom Layer w0.152: v1(111.175,117.977) 111.175,117.992 111.482,118.299 111.734,118.299 112.505,119.069 112.505,125.375 112.125,125.755 104.177,125.755 103.615,126.317 103.615,165.56 105.246,167.191 182.147,167.191 184.447,164.891 184.447,154.502 184.349,154.404 U3.124@184.349,153.914 ; 118.462,118.273 118.486,118.249 118.901,118.249 J4.14@118.975,118.175 119.049,118.249 119.464,118.249 119.488,118.273 119.973,118.273 119.999,118.299 120.729,118.299 v1(121.05,117.977)
DSI_D0_N: J4.18 U3.122 | length 154.6
  Bottom Layer w0.152: J4.18@118.975,120.175 119.049,120.101 119.464,120.101 119.488,120.077 119.977,120.077 120.375,120.475 120.375,125.397 119.597,126.175 104.188,126.175 103.92,126.443 103.92,165.434 105.372,166.886 182.021,166.886 183.252,165.655 183.252,154.502 183.349,154.404 U3.122@183.349,153.914
DSI_D0_P: J4.17 U3.121 | length 154.1
  Bottom Layer w0.152: J4.17@118.975,119.675 119.049,119.749 119.464,119.749 119.488,119.773 120.104,119.773 120.68,120.349 120.68,125.524 119.723,126.48 104.314,126.48 104.225,126.569 104.225,165.308 105.498,166.581 181.895,166.581 182.947,165.529 182.947,154.502 182.849,154.404 U3.121@182.849,153.914
DSI_D1_N: J4.12 U3.128 | length 170.5
  Top Layer w0.152: v1(113.3,117.3) 113.308,117.3 113.618,116.99 117.436,116.99 117.741,117.295 121.445,117.295 v1(121.825,117.675)
  Bottom Layer w0.152: 102.645,125.025 102.645,122.674 110.949,114.37 114.211,114.37 114.478,114.638 114.478,116.382 113.87,116.99 113.618,116.99 113.308,117.3 v1(113.3,117.3) ; 102.645,125.075 102.645,165.883 104.867,168.105 182.526,168.105 186.252,164.38 186.252,154.502 186.349,154.404 U3.128@186.349,153.914 ; J4.12@118.975,117.175 119.049,117.101 119.464,117.101 119.488,117.077 120.139,117.077 120.357,117.295 121.445,117.295 v1(121.825,117.675)
DSI_D1_P: J4.11 U3.127 | length 168
  Top Layer w0.152: v1(113.3,116.375) 113.308,116.375 113.618,116.685 117.562,116.685 117.868,116.991 121.445,116.991 v1(121.825,116.611)
  Bottom Layer w0.152: v1(113.3,116.375) 113.308,116.375 113.618,116.685 113.744,116.685 114.174,116.256 114.174,114.764 114.084,114.675 111.075,114.675 102.95,122.8 102.95,125.025 102.95,165.757 104.993,167.8 182.4,167.8 185.947,164.253 185.947,154.502 185.849,154.404 U3.127@185.849,153.914 ; J4.11@118.975,116.675 119.049,116.749 119.464,116.749 119.488,116.773 120.265,116.773 120.483,116.991 121.445,116.991 v1(121.825,116.611)
DSI_RESET: J4.9 J5.7 M4.1 | length 83.5
  Top Layer w0.152: v1(114.084,134.75) 114.084,144.884 115.175,145.975 128.9,145.975 129.261,146.336 v1(129.293,146.336) ; v1(148.789,147.222) 149.781,147.222 M4.1@149.797,147.238
  Bottom Layer w0.152: v1(114.084,134.75) 114.775,134.75 ; J5.7@118.628,135.55 115.15,135.55 114.775,135.175 114.775,134.75 ; J4.9@118.975,115.675 121.763,115.675 122.595,116.508 122.595,126.833 122.283,127.145 115.46,127.145 114.775,127.83 114.775,134.75 ; v1(129.293,146.336) 130.215,145.414 136.737,145.414 137.823,144.329 146.623,144.329 147.904,145.61 147.904,146.336 v1(148.789,147.222)
DSI_TE: J4.8 U3.88 | length 99.9
  Top Layer w0.152: v1(115.849,134.75) 116.229,135.13 129.2,135.13 129.691,135.621 v1(129.691,144.753)
  Bottom Layer w0.152: v1(115.849,134.75) 115.28,134.75 115.08,134.55 115.08,127.956 115.586,127.45 122.498,127.45 122.9,127.048 122.9,116.381 121.694,115.175 J4.8@118.975,115.175 ; v1(129.691,144.753) 136.537,144.753 137.57,143.719 148.095,143.719 148.996,142.819 152.601,142.819 155.392,145.61 163.465,145.61 165.16,143.914 U3.88@172.849,143.914
ENC1_I: C51.1 TS1.b U3.46 | length 78.7
  Top Layer w0.152: v1(172.021,117.58) 172.021,104.308 172.733,103.595 v1(174.431,103.595)
  Bottom Layer w0.152: v1(172.021,117.58) 172.419,117.978 177.017,117.978 177.571,118.533 177.571,122.84 177.849,123.118 U3.46@177.849,124.414 ; v1(174.431,103.595) 179.329,103.595 184.381,98.543 189.938,98.543 190.548,97.934 190.548,94.774 191.17,94.152 212.68,94.152 212.769,94.063 212.769,89.206 213.19,88.785 C51.1@214.35,88.785
ENC1_Q: C52.1 TS1.d U3.166 | length 46.5
  Top Layer w0.152: v1(223.425,100.1) 223.425,135.295
  Bottom Layer w0.152: U3.166@202.349,147.414 213.631,147.414 ; v1@223.375,100.05 v1(223.425,100.1)
ENC2_I: J1UI.A4 U3.190 | length 93.7
  Top Layer w0.152: v1(163.607,160.675) 177.65,160.675 181.866,164.891 v1(187.319,164.891) ; v1(203.9,167.2) 206.564,167.2 208.544,165.219 208.544,148.076 206.389,145.921 204.473,145.921 204.473,144.597 205.81,143.26 206.795,143.26 207.1,142.955 v1(207.223,142.955)
  Bottom Layer w0.152: 163.602,159.416 163.607,159.421 v1(163.607,160.675) ; v1(187.319,164.891) 189.618,167.191 v1@203.9,167.191 ; U3.190@202.349,135.414 202.839,135.414 203.034,135.219 204.117,135.219 204.922,134.414 208.382,134.414 210.37,136.403 210.37,138.283 208.471,140.182 208.471,141.643 v1@207.2,142.914
ENC2_Q: J1UI.A5 U3.143 | length 44.7
  Top Layer w0.152: v1(162.325,158.175) 163.21,159.06 179.71,159.06 181.634,160.984 192.584,160.984 193.725,162.125 v1(195.036,162.125)
  Bottom Layer w0.152: v1(162.325,158.175) 162.325,159.408 162.332,159.416 ; U3.143@193.849,153.914 193.849,161.586 193.938,161.675 194.71,161.675 195.036,162.001 v1(195.036,162.125)
FAN_ON: M53.1 SW45.1 | length 200.7
  Top Layer w0.152: v1(30.156,151.239) 30.549,151.632 30.549,154.3 30.46,154.389 27.323,154.389 27.063,154.65 27.063,167.311 27.063,168.917 27.401,169.256 29.007,169.256 67.514,169.256 67.755,169.015 67.755,162.441 69.826,160.37 83.651,160.37 83.88,160.598 150.642,160.598 152.644,162.6 177.743,162.6 181.918,166.775 195.225,166.775 195.472,166.528 M53.1@195.472,165.803
FAN_ON1: J3UI.A10 SW45.2 | length 64.3
  Top Layer w0.152: v1(30.85,149.207) 30.88,149.237 30.88,154.561 30.746,154.694 27.457,154.694 27.368,154.783 27.368,168.791 27.528,168.951 58.711,168.951 58.8,168.862 v1(58.8,165)
  Bottom Layer w0.152: 57.78,159.45 57.78,162.84 58.8,163.86 v1(58.8,165)
FMC_A0: U3.22 U19.25 | length 88.8
  Top Layer w0.152: v1(189.711,126.515) 189.689,126.493 189.689,125.986 189.849,125.826 189.849,96.641 189.849,89.025 189.849,88.486 190.423,88.486 190.423,87.826 189.849,87.826 189.849,87.165 190.589,87.165 190.589,86.505 189.849,86.505 189.849,85.845 190.589,85.845 190.589,85.184 189.849,85.184 189.849,84.524 190.589,84.524 190.589,83.863 189.849,83.863 189.849,83.203 190.589,83.203 190.589,82.543 189.849,82.543 189.849,81.882 190.589,81.882 190.589,81.222 189.849,81.222 189.849,80.561 190.589,80.561 190.589,79.901 189.849,79.901 189.849,79.241 190.589,79.241 190.589,78.58 189.849,78.58 189.849,77.92 189.993,77.92 190.069,77.844 190.198,77.715 190.198,76.408 189.933,76.143 v1(189.869,76.143)
  Bottom Layer w0.152: U19.25@168.456,79.06 168.456,76.327 168.683,76.1 179.682,76.1 179.685,76.097 189.823,76.097 v1(189.869,76.143) ; v1(189.711,126.515) 189.711,125.964 189.832,125.844 189.832,124.432 U3.22@189.849,124.414
FMC_A1: U3.23 U19.26 | length 88.3
  Top Layer w0.152: v1@189.349,125.354 189.349,97.014 189.349,96.897 189.544,96.702 189.544,95.799 189.379,95.799 189.379,95.138 189.544,95.138 189.544,94.478 188.959,94.478 188.959,93.818 189.544,93.818 189.544,93.157 188.959,93.157 188.959,92.497 189.544,92.497 189.544,91.836 188.959,91.836 188.959,91.176 189.544,91.176 189.544,90.516 188.959,90.516 188.959,89.855 189.544,89.855 189.544,89.195 188.959,89.195 188.959,88.534 189.544,88.534 189.544,87.874 188.959,87.874 188.959,87.214 189.544,87.214 189.544,86.553 188.959,86.553 188.959,85.893 189.544,85.893 189.544,85.232 188.959,85.232 188.959,84.572 189.544,84.572 189.544,83.912 188.959,83.912 188.959,83.251 189.544,83.251 189.544,82.591 188.959,82.591 188.959,81.93 189.544,81.93 189.544,81.27 188.959,81.27 188.959,80.61 189.544,80.61 189.544,79.949 188.959,79.949 188.959,79.289 189.544,79.289 189.544,78.628 188.959,78.628 188.959,77.968 189.544,77.968 189.544,77.892 189.544,77.536 189.577,77.503 v1(189.577,77.01)
  Bottom Layer w0.152: U19.26@168.956,79.06 168.956,76.691 169.242,76.405 179.808,76.405 179.811,76.402 188.968,76.402 v1(189.577,77.01) ; U3.23@189.349,124.414 v1@189.349,125.354
  other v1: 189.267,125.587
FMC_A2: U3.24 U19.27 | length 86.9
  Top Layer w0.152: v1(188.538,76.97) 188.626,77.058 188.626,77.381 188.654,77.409 188.654,87.495 188.654,87.572 188.1,87.572 188.1,88.232 188.654,88.232 188.654,88.892 188.1,88.892 188.1,89.553 188.654,89.553 188.654,90.213 188.1,90.213 188.1,90.874 188.654,90.874 188.654,91.534 188.1,91.534 188.1,92.194 188.654,92.194 188.654,92.855 188.1,92.855 188.1,93.515 188.654,93.515 188.654,94.176 188.1,94.176 188.1,94.836 189.057,94.836 189.057,95.496 188.1,95.496 188.1,96.157 189.055,96.157 189.055,96.817 188.1,96.817 188.1,97.478 189.044,97.478 189.044,98.138 188.1,98.138 188.1,98.798 188.654,98.798 188.654,99.182 188.654,125.48 188.654,125.796 189.116,126.258 v1(189.116,127.02)
  Bottom Layer w0.152: U19.27@169.456,79.06 169.456,76.928 169.674,76.71 187.269,76.71 187.53,76.97 v1(188.538,76.97) ; U3.24@188.849,124.414 188.849,125.251 188.733,125.366 188.733,125.823 189.116,126.206 v1(189.116,127.02)
FMC_A3: U3.25 U19.60 | length 88.5
  Top Layer w0.152: v1(188.316,126.309) 187.795,125.788 187.795,87.826 187.795,86.857 188.111,86.857 188.111,86.197 187.795,86.197 187.795,85.537 188.349,85.537 188.349,84.876 187.795,84.876 187.795,84.216 188.349,84.216 188.349,83.555 187.795,83.555 187.795,82.895 188.349,82.895 188.349,82.235 187.795,82.235 187.795,81.574 188.349,81.574 188.349,80.914 187.795,80.914 187.795,80.253 188.349,80.253 188.349,79.593 187.795,79.593 187.795,78.933 188.349,78.933 188.349,78.272 187.795,78.272 187.795,77.536 187.795,74.372 188.654,73.514 v1(189.802,72.366)
  Bottom Layer w0.152: U19.60@169.456,68.06 169.456,71.761 169.545,71.85 189.403,71.85 189.802,72.249 v1(189.802,72.366) ; v1(188.316,126.309) 188.332,126.292 188.332,124.431 U3.25@188.349,124.414
FMC_A4: U3.26 U19.61 | length 88
  Top Layer w0.152: v1(187.643,126.996) 187.643,126.067 187.491,125.915 187.491,110.368 187.491,109.882 187.052,109.882 187.052,109.222 187.491,109.222 187.491,108.561 187.052,108.561 187.052,107.901 187.491,107.901 187.491,107.24 187.052,107.24 187.052,106.58 187.491,106.58 187.491,105.92 187.052,105.92 187.052,105.259 187.491,105.259 187.491,104.599 187.052,104.599 187.052,103.938 187.491,103.938 187.491,103.278 187.052,103.278 187.052,102.618 187.491,102.618 187.491,101.957 187.052,101.957 187.052,101.297 187.491,101.297 187.491,100.636 187.459,100.636 187.459,99.976 187.491,99.976 187.491,99.9 187.491,73.885 v1(188.824,72.551)
  Bottom Layer w0.152: U19.61@168.956,68.06 168.956,72.066 169.045,72.155 188.428,72.155 v1(188.824,72.551) ; v1(187.643,126.996) 187.643,126.094 187.849,125.888 U3.26@187.849,124.414
FMC_A5: U3.27 U19.62 | length 86.9
  Top Layer w0.152: v1(186.747,127.079) 186.747,100.278 187.186,99.84 187.186,83.308 187.186,82.997 186.728,82.997 186.728,82.336 187.186,82.336 187.186,81.676 186.728,81.676 186.728,81.016 187.186,81.016 187.186,80.355 186.728,80.355 186.728,79.695 187.186,79.695 187.186,79.034 186.728,79.034 186.728,78.374 187.186,78.374 187.186,77.714 186.728,77.714 186.728,77.053 187.186,77.053 187.186,76.393 186.728,76.393 186.728,75.732 187.186,75.732 187.186,75.072 186.728,75.072 186.728,74.412 187.186,74.412 187.186,74.335 187.186,72.867 v1@187.313,72.74
  Bottom Layer w0.152: U19.62@168.456,68.06 168.456,72.451 168.694,72.689 v1@186.983,72.689 ; v1(186.747,127.079) 186.747,126.286 187.349,125.684 U3.27@187.349,124.414
  other v1: 187.186,72.689
FMC_A6: U3.68 U19.63 | length 88.1
  Top Layer w0.152: v1(168.009,66.715) 167.948,66.777 167.948,67.66 167.948,67.736 167.78,67.736 167.78,68.041 168.381,68.041 168.381,68.346 167.78,68.346 167.78,68.651 168.381,68.651 168.381,68.955 167.78,68.955 167.78,69.26 168.381,69.26 168.381,69.565 167.78,69.565 167.78,69.87 168.381,69.87 168.381,70.175 167.78,70.175 167.78,70.479 168.344,70.479 168.344,70.784 167.948,70.784 167.948,72.675 167.948,91.349 170.547,93.949 172.454,93.949 172.996,94.491 v1(172.996,95.117) ; v1(172.954,99.182) 172.962,99.19 172.962,100.883 171.781,102.064 171.425,102.064 170.979,102.51 170.979,103.848 168.862,105.965 168.862,108.826 167.882,109.806 167.882,133.63 167.999,133.747 v1(174.457,133.747)
  Bottom Layer w0.152: U19.63@167.956,68.06 167.973,68.043 167.973,66.751 v1(168.009,66.715) ; U3.68@172.849,133.914 173.83,133.914 173.997,133.747 v1(174.457,133.747) ; v1(172.954,99.182) 172.954,95.16 v1(172.996,95.117)
FMC_A7: U3.69 U19.64 | length 88.1
  Top Layer w0.152: v1(167.475,65.623) 168.207,65.623 168.847,66.263 168.847,91.818 170.674,93.644 172.733,93.644 173.775,94.686 v1(173.775,95.168) ; v1@172.174,100.883 170.995,102.063 170.674,102.063 170.674,103.722 168.557,105.838 168.557,108.699 167.552,109.705 167.552,133.926 167.936,134.311 174.485,134.311 174.609,134.435 v1(175.138,134.435)
  Bottom Layer w0.152: U19.64@167.465,68.069 U19.64@167.456,68.06 167.456,65.622 v1@167.475,65.603 ; v1(172.174,100.903) 173.622,99.456 173.622,98.47 173.456,98.305 173.456,96.718 173.775,96.399 v1(173.775,95.168) ; U3.69@172.849,134.414 173.77,134.414 173.837,134.348 174.279,134.348 174.346,134.414 175.118,134.414 v1(175.138,134.435)
FMC_A8: U3.70 U19.65 | length 88
  Top Layer w0.152: v1(166.923,66.715) 166.957,66.75 166.957,67.156 166.957,67.537 167.087,67.537 167.087,67.842 166.664,67.842 166.664,68.147 167.087,68.147 167.087,68.452 166.664,68.452 166.664,68.756 167.087,68.756 167.087,69.061 166.664,69.061 166.664,69.366 167.087,69.366 167.087,69.671 166.664,69.671 166.664,69.976 167.087,69.976 167.087,70.28 166.664,70.28 166.664,70.585 167.087,70.585 167.087,70.89 166.664,70.89 166.664,71.195 167.087,71.195 167.087,71.5 166.789,71.5 166.789,71.804 166.957,71.804 166.957,74.727 166.957,94.701 167.374,95.117 v1(170.312,95.117) ; v1@171.284,100.887 170.369,101.802 170.369,103.595 168.252,105.712 168.252,108.573 167.247,109.579 167.247,134.187 167.941,134.881 v1(174.058,134.881)
  Bottom Layer w0.152: v1(166.923,66.715) 166.939,66.732 166.939,68.043 U19.65@166.956,68.06 ; v1(170.312,95.117) 170.312,99.241 171.318,100.248 v1(171.318,100.899) ; U3.70@172.849,134.914 174.024,134.914 v1(174.058,134.881)
FMC_A9: U3.71 U19.66 | length 86.4
  Top Layer w0.152: v1(166.487,65.636) 166.991,66.14 167.102,66.14 167.475,66.514 167.475,93.949 168.017,94.491 v1(169.634,94.491) ; v1(170.369,100.855) 170.312,100.913 170.312,101.247 170.064,101.495 170.064,103.469 167.948,105.586 167.948,108.447 166.79,109.605 166.79,134.477 167.787,135.474 v1(175.069,135.474)
  Bottom Layer w0.152: v1@166.449,65.622 166.456,65.629 166.456,66.428 166.389,66.494 166.389,66.936 166.456,67.003 U19.66@166.456,68.06 U19.66@166.449,68.067 ; v1(169.634,94.491) 169.634,99.163 170.369,99.898 v1(170.369,100.855) ; U3.71@172.849,135.414 174.543,135.414 174.602,135.474 v1(175.069,135.474)
FMC_A10: U3.72 U19.24 | length 88.4
  Top Layer w0.152: v1(169.634,100.04) 169.634,100.506 169.76,100.631 169.76,103.343 167.567,105.536 167.567,108.043 166.436,109.174 166.436,135.434 167.045,136.043 v1(174.048,136.043)
  Bottom Layer w0.152: U19.24@167.956,79.06 167.956,88.98 167.956,89.056 167.4,89.056 167.4,89.361 168.084,89.361 168.084,89.666 167.4,89.666 167.4,89.971 168.084,89.971 168.084,90.275 167.4,90.275 167.4,90.58 168.084,90.58 168.084,90.885 167.4,90.885 167.4,91.19 168.084,91.19 168.084,91.495 167.4,91.495 167.4,91.799 168.084,91.799 168.084,92.104 167.4,92.104 167.4,92.409 168.084,92.409 168.084,92.714 167.4,92.714 167.4,93.019 168.084,93.019 168.084,93.323 167.4,93.323 167.4,93.628 168.084,93.628 168.084,93.933 167.4,93.933 167.4,94.238 168.084,94.238 168.084,94.543 167.4,94.543 167.4,94.847 168.084,94.847 168.084,95.152 167.4,95.152 167.4,95.457 168.084,95.457 168.084,95.762 167.4,95.762 167.4,96.067 168.084,96.067 168.084,96.371 167.4,96.371 167.4,96.676 168.084,96.676 168.084,96.981 167.4,96.981 167.4,97.286 168.084,97.286 168.084,97.591 167.4,97.591 167.4,97.895 168.084,97.895 168.084,98.2 167.956,98.2 167.956,98.305 167.956,98.9 169.076,100.02 v1@169.634,100.02 ; U3.72@172.855,135.921 U3.72@172.849,135.914 173.795,135.914 173.924,136.043 v1(174.048,136.043)
FMC_A11: U3.75 U19.21 | length 88.8
  Top Layer w0.152: v1(169.226,100.852) 169.226,103.19 167.262,105.155 167.262,107.917 166.085,109.093 166.085,136.97 166.434,137.319 v1(174.942,137.319)
  Bottom Layer w0.152: U19.21@166.456,79.06 166.456,80.36 166.456,80.436 166.261,80.436 166.261,80.741 166.88,80.741 166.88,81.046 166.261,81.046 166.261,81.351 166.88,81.351 166.88,81.655 166.261,81.655 166.261,81.96 166.88,81.96 166.88,82.265 166.261,82.265 166.261,82.57 166.88,82.57 166.88,82.875 166.261,82.875 166.261,83.179 166.88,83.179 166.88,83.484 166.261,83.484 166.261,83.789 166.88,83.789 166.88,84.094 166.261,84.094 166.261,84.399 166.88,84.399 166.88,84.703 166.261,84.703 166.261,85.008 166.88,85.008 166.88,85.313 166.261,85.313 166.261,85.618 166.88,85.618 166.88,85.923 166.261,85.923 166.261,86.227 166.88,86.227 166.88,86.532 166.261,86.532 166.261,86.837 166.88,86.837 166.88,87.142 166.261,87.142 166.261,87.447 166.88,87.447 166.88,87.751 166.261,87.751 166.261,88.056 166.88,88.056 166.88,88.361 166.261,88.361 166.261,88.666 166.708,88.666 166.708,88.971 166.449,88.971 166.449,89.136 166.449,89.212 166.449,98.543 168.738,100.832 v1@169.226,100.832 ; U3.75@172.849,137.414 173.671,137.414 173.766,137.319 v1(174.942,137.319)
FMC_BA0: U3.134 U19.22 | length 116
  Top Layer w0.152: v1(165.545,76.327) 165.494,76.379 165.494,99.348 165.405,99.437 160.615,99.437 160.516,99.536 160.516,102.082 159.575,103.023 159.575,109.796 158.975,110.396 158.975,148.339 160.882,150.246 174.332,150.246 174.332,150.222 174.611,149.943 174.738,149.943 174.743,149.948 175.381,149.948 175.578,150.146 188.234,150.146 189.421,151.332 v2(189.421,151.465)
  Bottom Layer w0.152: v1(165.545,76.327) 166.456,76.327 166.956,76.827 U19.22@166.956,79.06 ; U3.134@189.349,153.914 189.349,151.537 v2(189.421,151.465)
FMC_BA1: U3.135 U19.23 | length 105.2
  Top Layer w0.152: v2(190.056,152.166) 190.056,128.315 190.894,127.477 190.894,76.963 190.776,76.844 v1(190.776,75.609)
  Bottom Layer w0.152: U19.23@167.456,79.06 167.456,76.134 167.798,75.792 189.4,75.792 189.583,75.609 v1(190.776,75.609) ; v2@189.849,152.177 U3.135@189.849,153.914
FMC_D0: U3.115 U19.2 | length 120.5
  Top Layer w0.152: v1(156.518,82.032) 156.518,84.389 156.518,84.466 155.854,84.466 155.854,84.77 156.518,84.77 156.518,85.075 155.854,85.075 155.854,85.38 156.518,85.38 156.518,85.685 155.854,85.685 155.854,85.99 156.518,85.99 156.518,86.294 155.854,86.294 155.854,86.599 156.518,86.599 156.518,86.904 155.854,86.904 155.854,87.209 156.518,87.209 156.518,87.514 155.854,87.514 155.854,87.818 156.518,87.818 156.518,88.123 155.854,88.123 155.854,88.428 156.518,88.428 156.518,88.733 155.854,88.733 155.854,89.038 156.518,89.038 156.518,89.342 155.854,89.342 155.854,89.647 156.537,89.647 156.537,89.952 155.854,89.952 155.854,90.257 156.518,90.257 156.518,90.562 155.854,90.562 155.854,90.866 156.556,90.866 156.556,91.171 155.854,91.171 155.854,91.476 156.518,91.476 156.518,91.781 155.854,91.781 155.854,92.086 156.521,92.086 156.521,92.39 155.854,92.39 155.854,92.695 156.518,92.695 156.518,93 155.854,93 155.854,93.305 156.518,93.305 156.518,93.61 155.854,93.61 155.854,93.914 156.518,93.914 156.518,94.219 155.854,94.219 155.854,94.524 156.518,94.524 156.518,94.829 156.444,94.829 156.444,95.134 156.518,95.134 156.518,95.699 156.518,149.625 160.34,153.447 160.344,153.447 160.522,153.624 178.669,153.624 179.816,152.478 v1(179.816,152.477)
  Bottom Layer w0.152: v1(156.518,82.032) 156.518,81.531 156.956,81.092 U19.2@156.956,79.06 ; v1(179.816,152.477) 179.816,152.626 179.849,152.659 U3.115@179.849,153.914
FMC_D1: U3.116 U19.4 | length 120.4
  Top Layer w0.152: v1(158.099,83.574) 156.822,84.85 156.822,86.019 156.822,86.4 157.138,86.4 157.138,86.705 156.822,86.705 156.822,87.01 157.138,87.01 157.138,87.315 156.822,87.315 156.822,87.619 157.138,87.619 157.138,87.924 156.822,87.924 156.822,88.229 157.138,88.229 157.138,88.534 156.822,88.534 156.822,88.839 157.138,88.839 157.138,89.143 156.822,89.143 156.822,89.448 157.138,89.448 157.138,89.753 156.841,89.753 156.841,90.058 157.137,90.058 157.137,90.363 156.822,90.363 156.822,90.667 157.136,90.667 157.136,90.972 156.861,90.972 156.861,91.277 157.138,91.277 157.138,91.582 156.822,91.582 156.822,91.887 157.138,91.887 157.138,92.191 156.826,92.191 156.826,92.496 157.138,92.496 157.138,92.801 156.822,92.801 156.822,93.106 157.138,93.106 157.138,93.411 156.822,93.411 156.822,93.715 157.138,93.715 157.138,94.02 156.822,94.02 156.822,94.325 157.138,94.325 157.138,94.63 156.822,94.63 156.822,94.935 157.138,94.935 157.138,95.239 156.822,95.239 156.822,95.544 157.138,95.544 157.138,95.849 156.822,95.849 156.822,96.154 157.138,96.154 157.138,96.459 156.822,96.459 156.822,96.763 157.138,96.763 157.138,97.068 156.822,97.068 156.822,97.373 157.138,97.373 157.138,97.678 156.822,97.678 156.822,97.983 157.138,97.983 157.138,98.287 156.822,98.287 156.822,98.592 157.138,98.592 157.138,98.897 156.822,98.897 156.822,99.202 157.138,99.202 157.138,99.507 156.822,99.507 156.822,99.811 157.138,99.811 157.138,100.116 156.822,100.116 156.822,100.421 157.138,100.421 157.138,100.726 156.822,100.726 156.822,101.031 157.138,101.031 157.138,101.335 156.822,101.335 156.822,101.64 157.138,101.64 157.138,101.945 156.822,101.945 156.822,102.25 157.138,102.25 157.138,102.555 156.822,102.555 156.822,102.859 157.138,102.859 157.138,103.164 156.822,103.164 156.822,103.469 157.138,103.469 157.138,103.774 156.822,103.774 156.822,104.079 157.138,104.079 157.138,104.383 156.822,104.383 156.822,104.688 157.138,104.688 157.138,104.993 156.822,104.993 156.822,105.298 157.138,105.298 157.138,105.603 156.822,105.603 156.822,105.907 157.138,105.907 157.138,106.212 156.822,106.212 156.822,106.517 157.046,106.517 157.046,106.822 156.822,106.822 156.822,107.176 156.822,149.498 160.466,153.142 178.226,153.142 179.721,151.646 v1(180.584,151.646)
  Bottom Layer w0.152: U19.4@157.956,79.06 157.984,79.088 157.984,81.469 158.099,81.584 v1(158.099,83.574) ; U3.116@180.349,153.914 180.349,151.964 180.584,151.729 v1(180.584,151.646)
FMC_D2: U3.170 U19.5 | length 120.7
  Top Layer w0.152: v1(198.345,73.222) 197.987,73.58 197.987,142.955 200.64,145.609 v1(201.192,145.609)
  Bottom Layer w0.152: U19.5@158.456,79.06 158.456,74.809 159.647,73.618 186.499,73.618 187.053,74.173 188.819,74.173 189.356,73.636 197.905,73.636 198.319,73.222 v1(198.345,73.222) ; v1(201.192,145.609) 201.316,145.609 201.51,145.414 U3.170@202.349,145.414
FMC_D3: U3.171 U19.7 | length 122